# Altium PCB FlightController_Top_5x5.PcbDoc (part 1 of 4)
Units mm, origin at the board's own origin, x right, y up, seen from the top; angles counter-clockwise.
Board outline 127 x 127 mm, 2 copper layers (Top Layer, Bottom Layer), stack 0.691 mm thick; 156 components, 161 nets, 860 pads, 483 vias.
Unrouted connection lines stored in the file: 9.
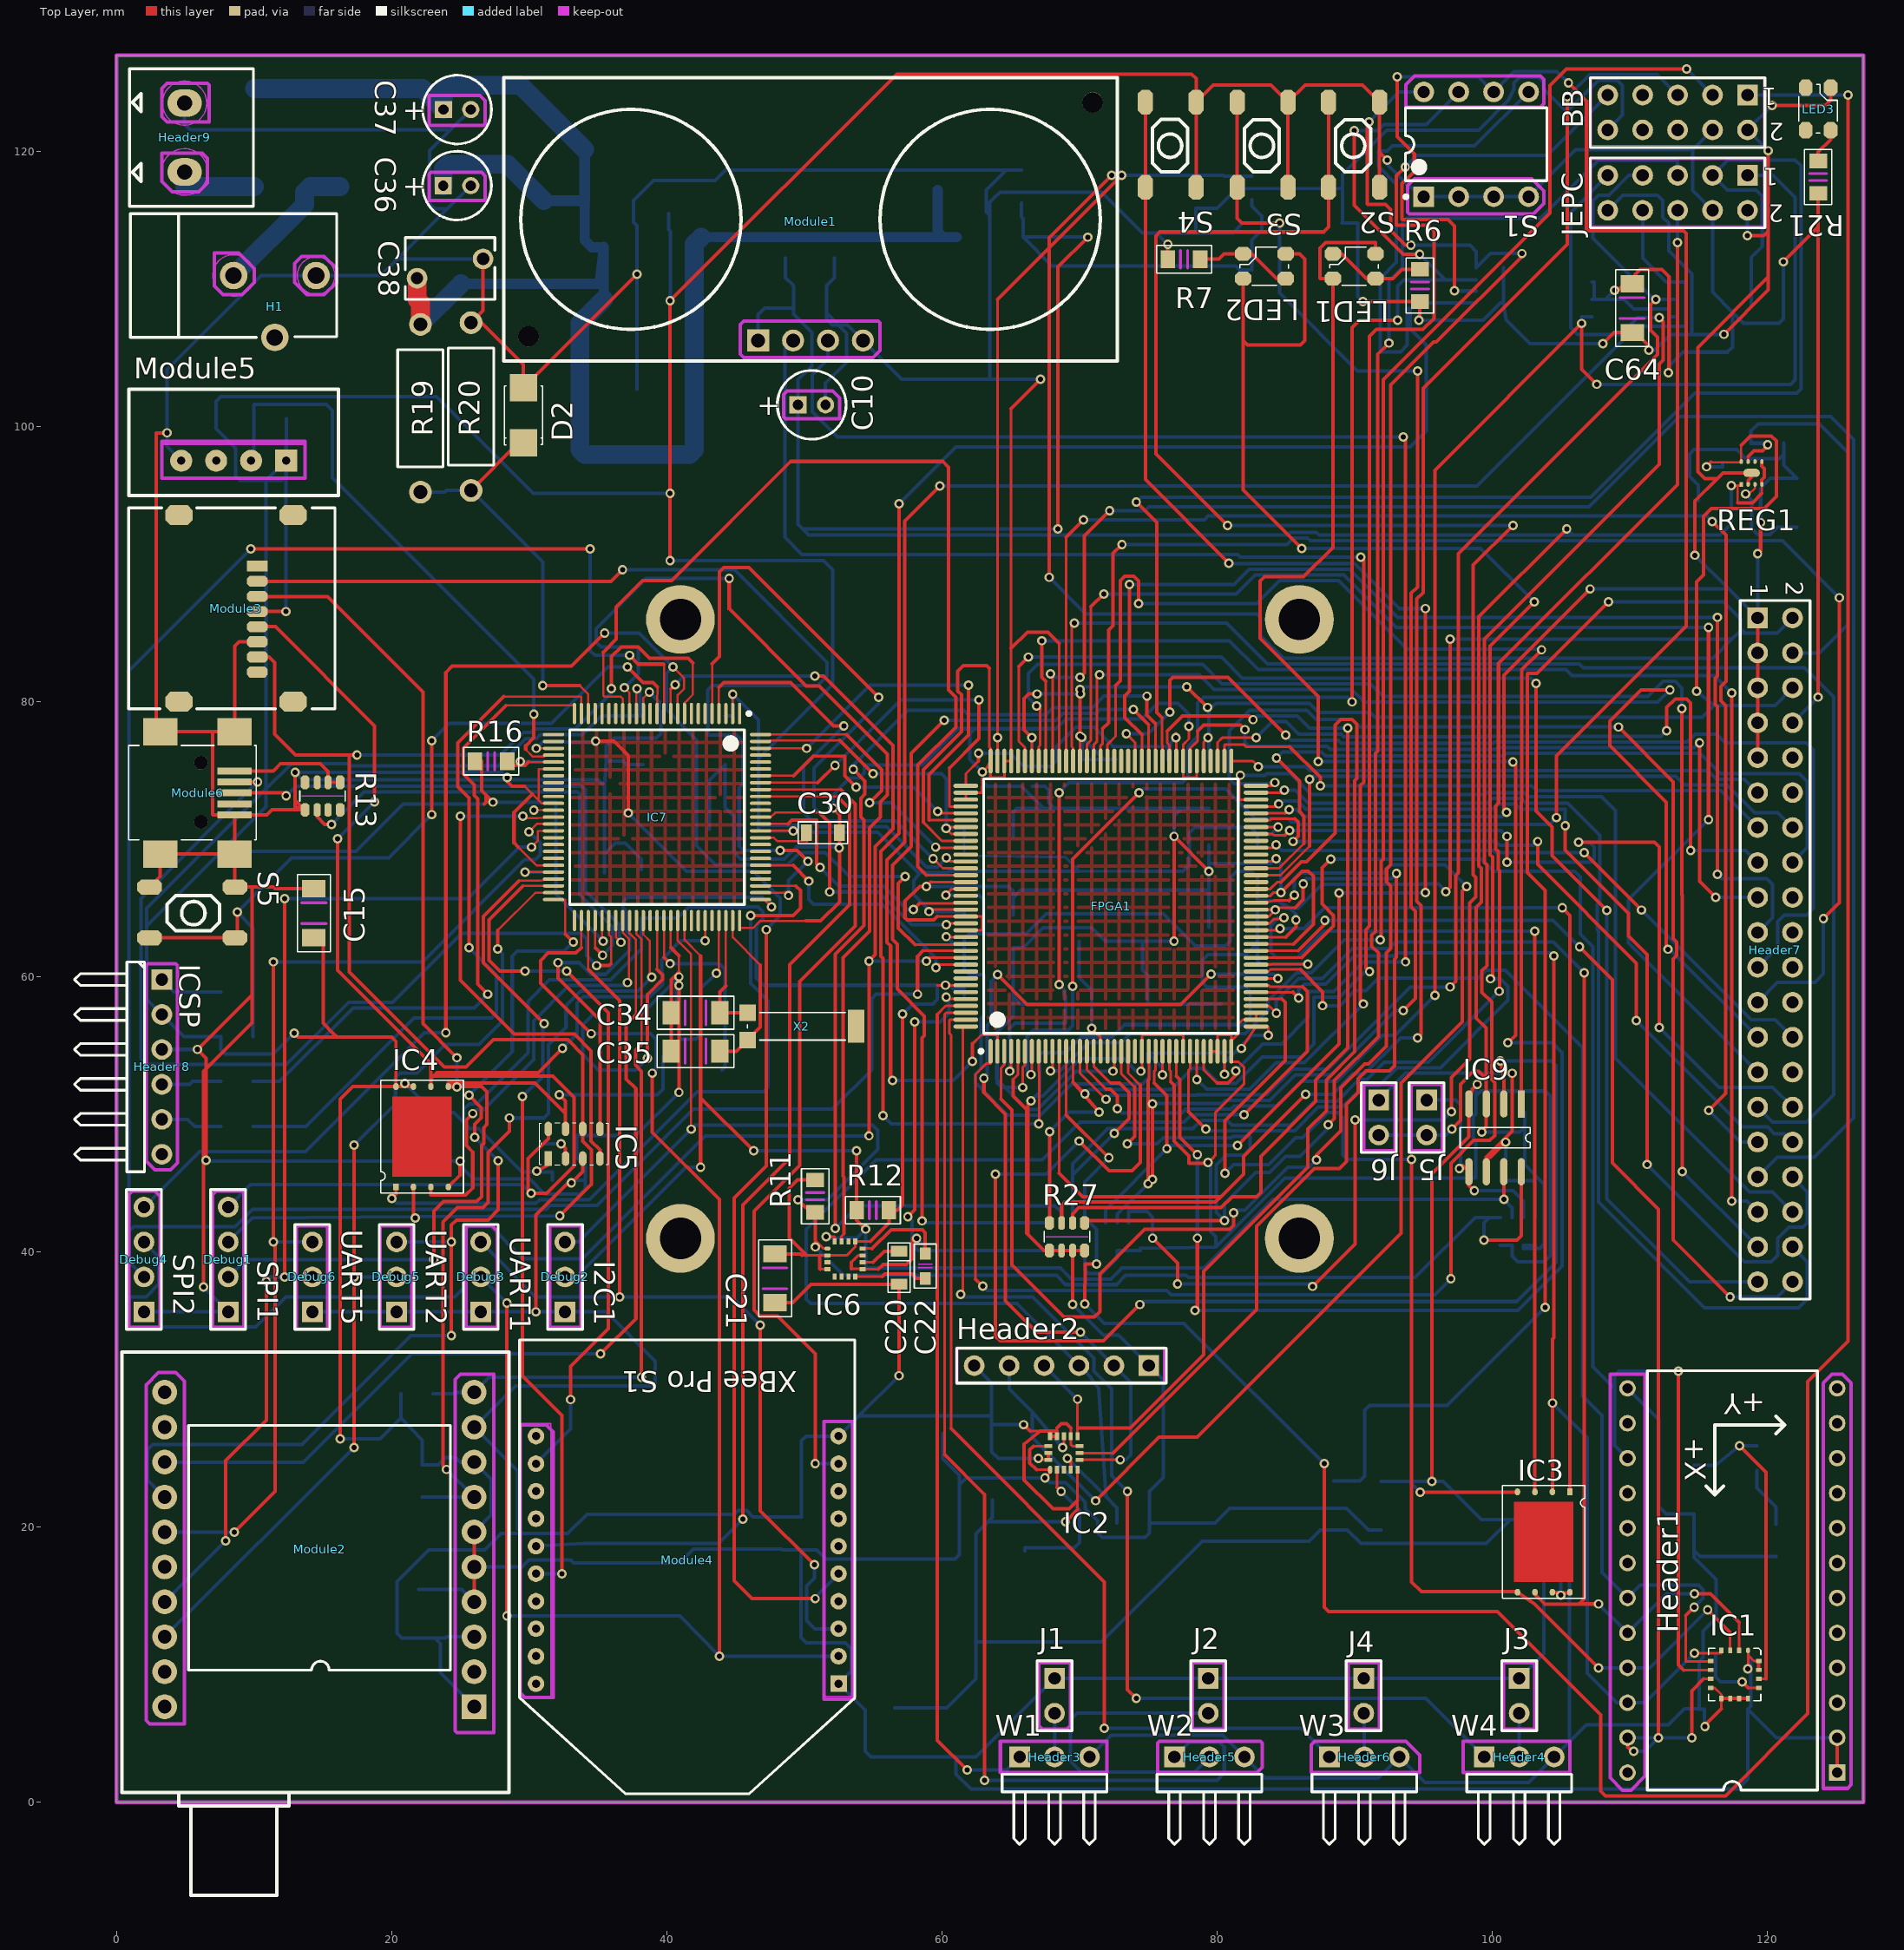
[diagram p0: Top Layer view]
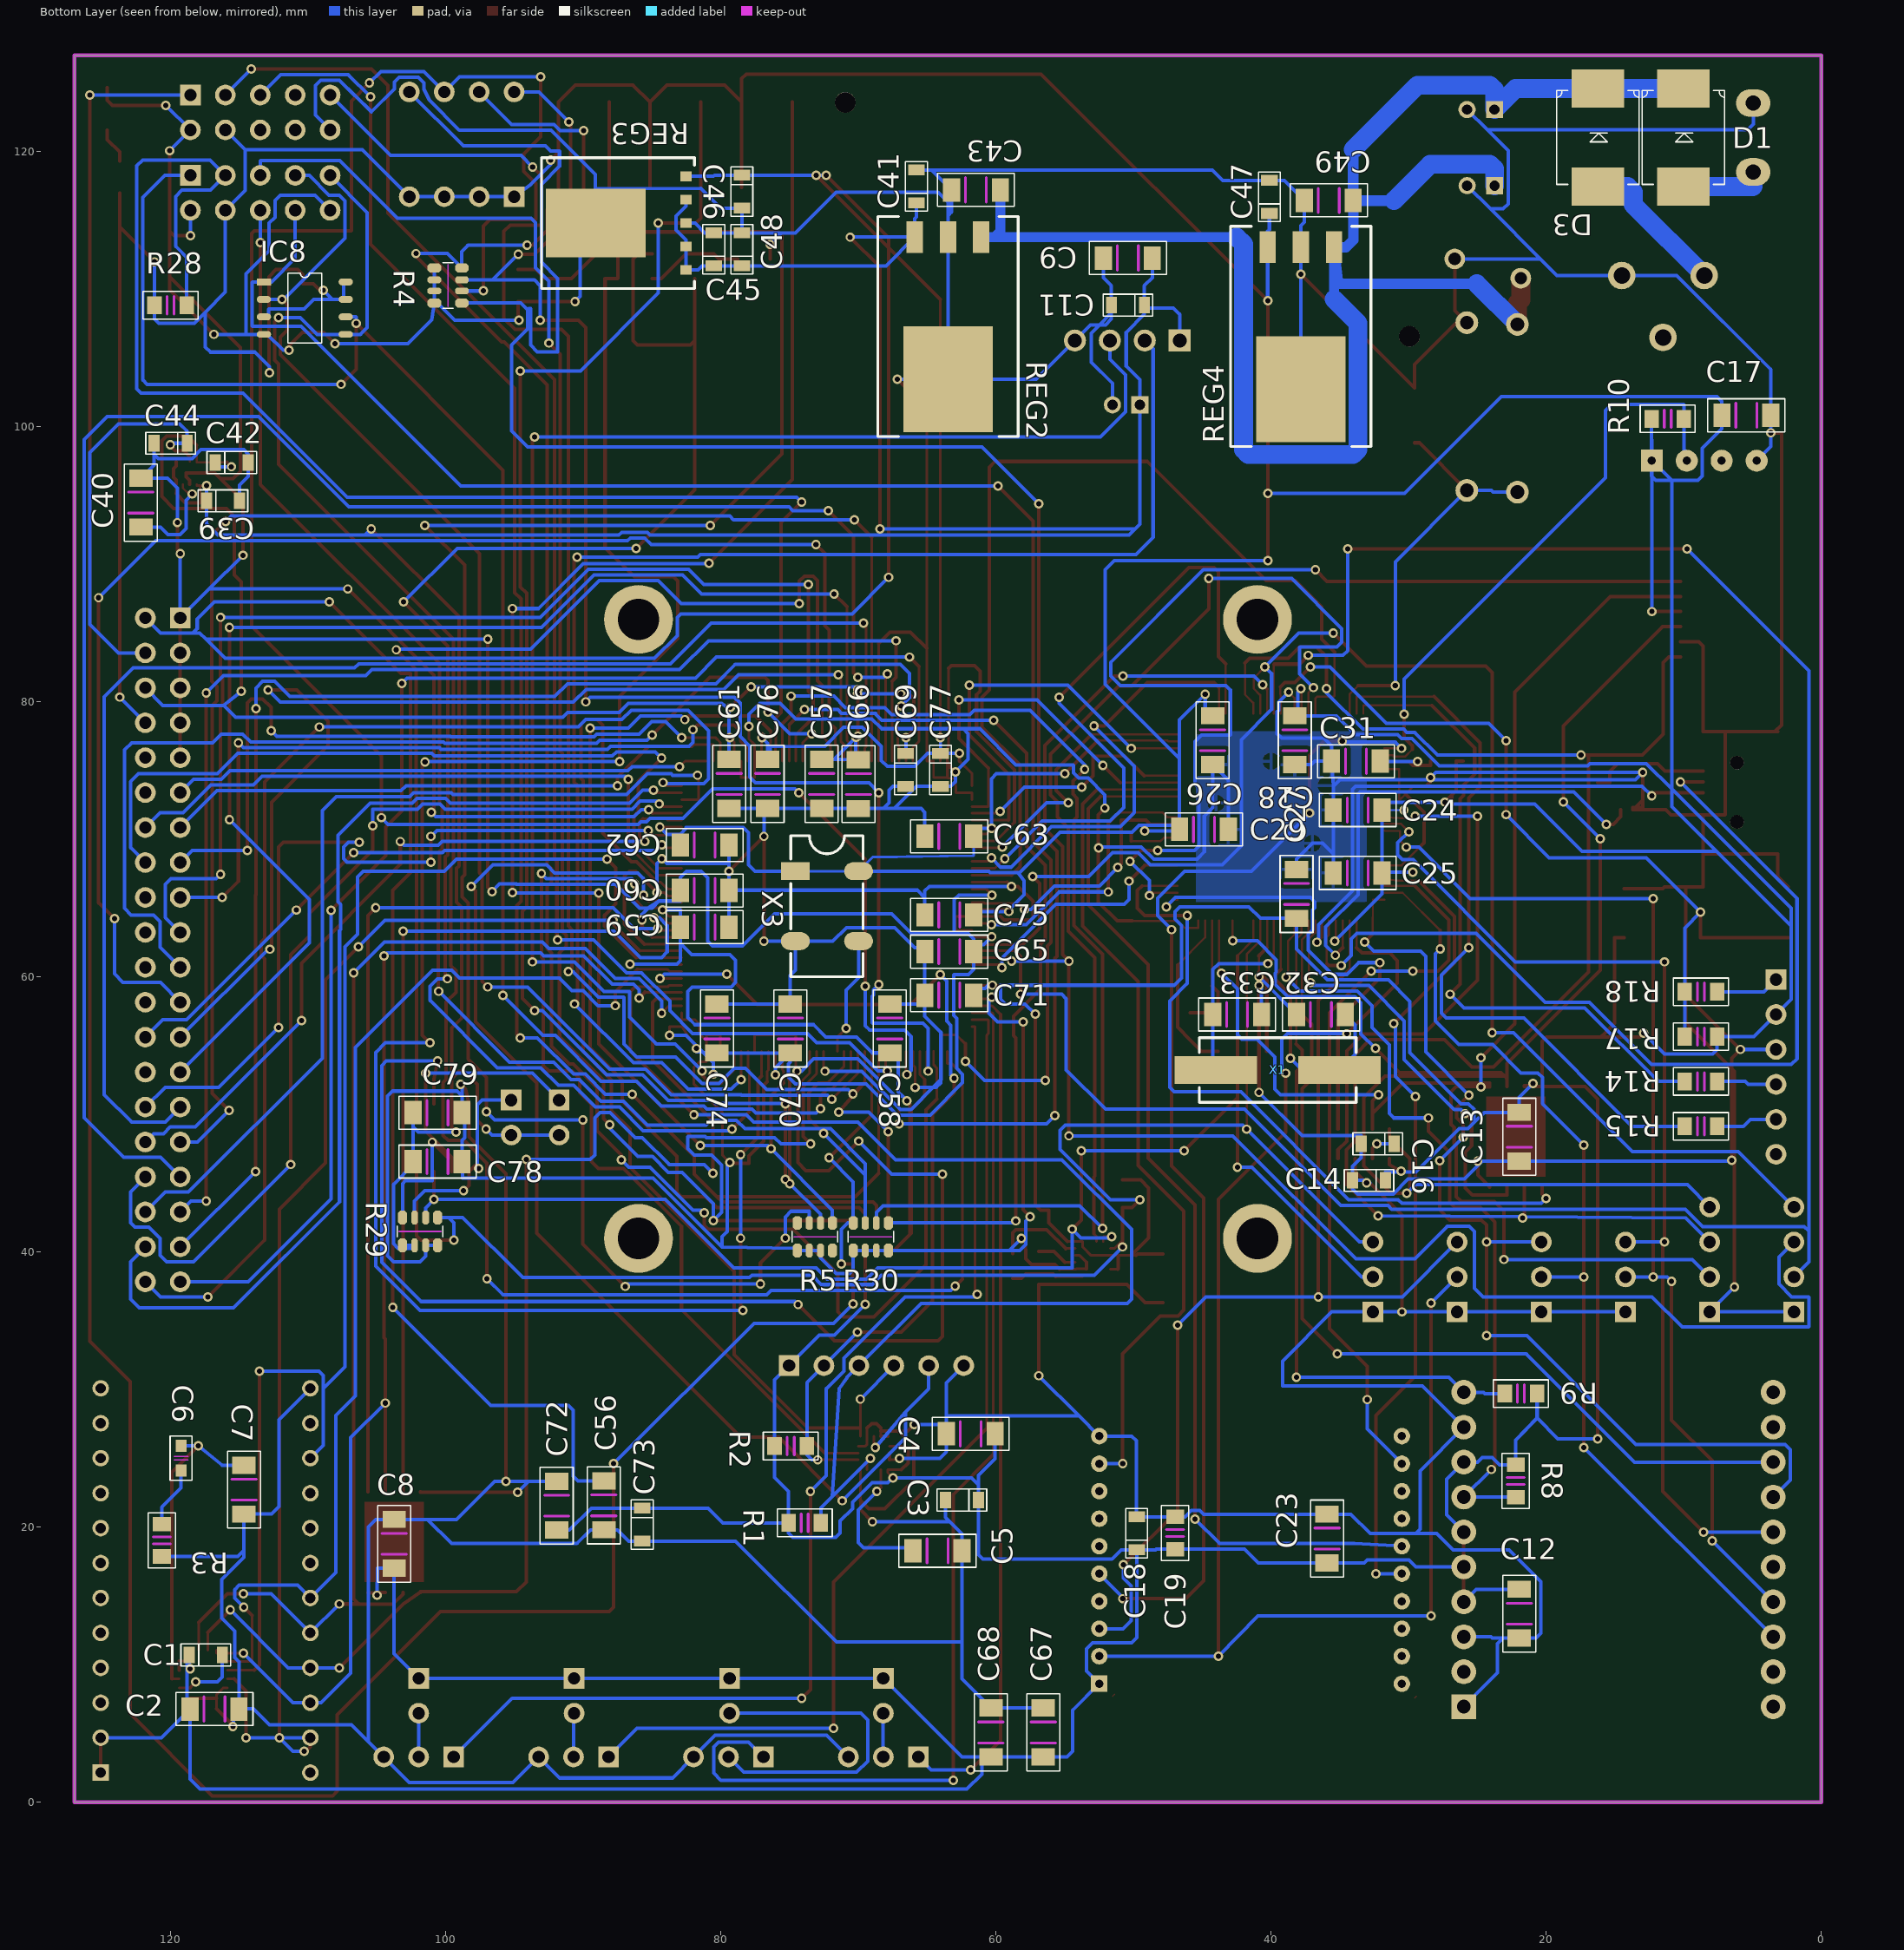
[diagram p1: Bottom Layer view, seen from below]

## Layer stack, top to bottom
Top Layer: signal copper 0.0356
Dielectric: core 0.62, FR-4, Dk 4.8
Bottom Layer: signal copper 0.0356

## Board outline
0,0 127,0 127,127 0,127

## Design rules (kind name [scope] priority, off if disabled: settings)
Clearance Clearance_Pads [IsPad] p1: gap=0.2
Clearance [All] p2: gap=0.154
ComponentClearance [Not All vs Not All] p1: gap=0.153 collisioncheckmode=3 verticalgap=0.254 showdistances=TRUE
DiffPairsRouting [All] p1: maxlimit=0.254 minlimit=0.254 mostfreqgap=0.254 maxuncoupledlength=12.7
Height [All] p1: minheight=0 maxheight=50 prefheight=12.7
HoleSize [All] p1: absolutevalues=TRUE maxlimit=3 minlimit=0.381 maxpercent=80.000 minpercent=20.000
HoleToHoleClearance [All] p1: gap=0.3 allowstackedmicrovias=FALSE
MinimumAnnularRing [All] p1: minimumring=0.089
MinimumSolderMaskSliver [All] p1: minsoldermaskwidth=0.152
PlaneConnect [All] p1: planeconnectstyle=Relief reliefexpansion=0.178 reliefentries=4 reliefconductorwidth=0.381 reliefairgap=0.381
PolygonConnect [All] p1: connectstyle=Relief reliefconductorwidth=0.152 reliefentries=4 polygonreliefangle="45 Angle"
RoutingVias [All] p1: holewidth=0.381 width=0.686 viastyle="Through Hole" minholewidth=0.381 minwidth=0.686 maxholewidth=0.381 maxwidth=0.686
SMDNeckDown [All] p1: percent=63.000
SilkToSilkClearance [All] p1: silktosilkclearance=0.152
SilkscreenOverComponentPads [All] p1: minsilkscreentomaskgap=0.1
SolderMaskExpansion [All] p1: expansion=0
ViasUnderSMD [All] p1: allowed=FALSE
Width Width_Input [(InNet('NetD1_0') OR InNet('NetD3_0') OR InNet('SYS'))] p1: maxlimit=2 minlimit=0.749 preferedwidth=1.37
Width [All] p2: maxlimit=2 minlimit=0.153 preferedwidth=0.254 minimp=50.000000 maximp=50.000000 favimp=50.000000
19 further rules are at their usual default settings.

## Classes and differential pairs
component class Navigator_Core: C24 C25 C26 C27 C28 C29 C30 C31 C32 C33 C34 C35 IC7 R16 R17 R18 S5 X1 X2
component class FPGA_Core: FPGA1 Header7
component class FPGA_Clocks: BB C56 C57 C58 C59 C60 C61 C62 C63 C64 C65 C66 C67 C68 C69 C70 C71 C72 C73 C74 C75 C76 C77 C78 C79 IC8 IC9 J5 J6 JEPC R27 R28 R29 R30 X3
component class FPGA_Components: C1 C2 C3 C4 C5 C6 C7 C8 C9 C10 C11 Header1 Header2 Header3 Header4 Header5 Header6 IC1 IC2 IC3 J1 J2 J3 J4 LED1 LED2 Module1 R1 R2 R3 R4 R5 R6 R7 S1 S2 S3 S4
component class Navigator_Components: C12 C13 C14 C15 C16 C17 C18 C19 C20 C21 C22 IC4 IC5 IC6 Module2 Module3 Module4 Module5 R8 R9 R10 R11 R12
component class Navigator_Connectors: C23 Debug1 Debug2 Debug3 Debug4 Debug5 Debug6 "Header 8" Module6 R13 R14 R15
component class Power: C36 C37 C38 C39 C40 C41 C42 C43 C44 C45 C46 C47 C48 C49 D1 D2 D3 H1 Header9 LED3 R19 R20 R21 REG1 REG2 REG3 REG4
differential pair USB_PIC: +USB_PIC_P -USB_PIC_N

## Components (designator, comment, footprint, x,y, rotation, side; value= is the part's Value field where it differs from the comment)
BB "Header 5X2" HDR2X5 118.575,124.122 r180 top (schematic designator Header13)
C1 "10uF Low-ESR Tantalum CaseA" "CAPACITOR - TANTALUM CASE A" 117.46,10.724 r180 bottom
C2 "0.1uF SMD 1206" "SMD 1206" 116.825,6.787 r0 bottom
C3 "4.7uF Low-ESR Tantalum CaseA" "CAPACITOR - TANTALUM CASE A" 62.484,21.971 r0 bottom
C4 "0.1uF SMD 1206" "SMD 1206" 61.849,26.797 r0 bottom
C5 "0.1uF SMD 1206" "SMD 1206" 64.262,18.288 r0 bottom
C6 "470nF SMD 0603" "SMD 0603" 119.253,25.019 r270 bottom
C7 "0.1uF SMD 1206" "SMD 1206" 114.681,22.733 r270 bottom
C8 "0.1uF SMD 1206" "SMD 1206" 103.759,18.796 r90 bottom
C9 "0.1uF SMD 1206" "SMD 1206" 50.419,112.268 r180 bottom
C10 "10uF Electrolitic" CAPPR2-5x5 50.546,101.6 r0 top
C11 "1.0uF Low-ESR Tantalum CaseA" "CAPACITOR - TANTALUM CASE A" 50.419,108.839 r0 bottom
C12 "0.1uF SMD 1206" "SMD 1206" 21.971,13.716 r270 bottom
C13 "0.1uF SMD 1206" "SMD 1206" 21.971,48.387 r270 bottom
C14 "1.0uF Low-ESR Tantalum CaseA" "CAPACITOR - TANTALUM CASE A" 32.893,45.212 r0 bottom
C15 "0.1uF SMD 1206" "SMD 1206" 14.351,64.643 r270 top
C16 "1.0uF Low-ESR Tantalum CaseA" "CAPACITOR - TANTALUM CASE A" 32.258,47.879 r0 bottom
C17 "0.1uF SMD 1206" "SMD 1206" 5.461,100.838 r180 bottom
C18 "1.0uF Low-ESR Tantalum CaseA" "CAPACITOR - TANTALUM CASE A" 49.784,19.558 r90 bottom
C19 "8.2pF SMD 0805" "SMD 0805" 46.99,19.579 r270 bottom
C20 "4.7uF Low-ESR Tantalum CaseA" "CAPACITOR - TANTALUM CASE A" 56.896,38.862 r270 top
C21 "0.1uF SMD 1206" "SMD 1206" 47.879,38.1 r270 top
C22 "220nF SMD 0603" "SMD 0603" 58.801,38.989 r270 top
C23 "0.1uF SMD 1206" "SMD 1206" 35.941,19.177 r270 bottom
C24 "0.1uF SMD 1206" "SMD 1206" 33.715,72.136 r0 bottom
C25 "0.1uF SMD 1206" "SMD 1206" 33.715,67.564 r0 bottom
C26 "0.1uF SMD 1206" "SMD 1206" 44.256,77.216 r270 bottom
C27 "0.1uF SMD 1206" "SMD 1206" 38.16,66.04 r90 bottom
C28 "0.1uF SMD 1206" "SMD 1206" 38.287,77.216 r270 bottom
C29 "0.1uF SMD 1206" "SMD 1206" 44.891,70.739 r180 bottom
C30 "10uF Low-ESR Tantalum CaseA" "CAPACITOR - TANTALUM CASE A" 51.368,70.485 r0 top
C31 "0.1uF SMD 1206" "SMD 1206" 33.842,75.692 r0 bottom
C32 "22pF SMD 1206" "SMD 1206" 36.382,57.277 r180 bottom
C33 "22pF SMD 1206" "SMD 1206" 42.478,57.277 r0 bottom
C34 "22pF SMD 1206" "SMD 1206" 42.097,57.404 r0 top
C35 "22pF SMD 1206" "SMD 1206" 42.097,54.61 r0 top
C36 "1.0uF Electrolitic" CAPPR2-5x5 24.758,117.533 r0 top
C37 "10uF Electrolitic" CAPPR2-5x5 24.765,123.063 r0 top
C38 "0.1uF Ceramic" CAPRD5-6.5x4.5 24.257,111.506 r180 top
C39 "1.0uF Low-ESR Tantalum CaseA" "CAPACITOR - TANTALUM CASE A" 116.205,94.615 r180 bottom
C40 "0.1uF SMD 1206" "SMD 1206" 122.174,94.488 r270 bottom
C41 "10uF Low-ESR Tantalum CaseA" "CAPACITOR - TANTALUM CASE A" 65.786,117.475 r90 bottom
C42 "1.0uF Low-ESR Tantalum CaseA" "CAPACITOR - TANTALUM CASE A" 115.57,97.409 r180 bottom
C43 "0.1uF SMD 1206" "SMD 1206" 61.468,117.221 r0 bottom
C44 "1.0uF Low-ESR Tantalum CaseA" "CAPACITOR - TANTALUM CASE A" 120.015,98.806 r0 bottom
C45 "1.0uF Low-ESR Tantalum CaseA" "CAPACITOR - TANTALUM CASE A" 80.518,112.903 r90 bottom
C46 "10uF Low-ESR Tantalum CaseA" "CAPACITOR - TANTALUM CASE A" 78.486,117.094 r270 bottom
C47 "10uF Low-ESR Tantalum CaseA" "CAPACITOR - TANTALUM CASE A" 40.132,116.713 r90 bottom
C48 "1.0uF Low-ESR Tantalum CaseA" "CAPACITOR - TANTALUM CASE A" 78.486,112.903 r90 bottom
C49 "0.1uF SMD 1206" "SMD 1206" 35.814,116.459 r180 bottom
C56 "0.1uF SMD 1206" "SMD 1206" 88.519,21.59 r270 bottom
C57 "0.1uF SMD 1206" "SMD 1206" 72.679,74.041 r270 bottom
C58 "0.1uF SMD 1206" "SMD 1206" 67.726,56.261 r90 bottom
C59 "0.1uF SMD 1206" "SMD 1206" 81.188,63.627 r180 bottom
C60 "0.1uF SMD 1206" "SMD 1206" 81.188,66.294 r180 bottom
C61 "0.1uF SMD 1206" "SMD 1206" 79.41,74.041 r270 bottom
C62 "0.1uF SMD 1206" "SMD 1206" 81.188,69.596 r180 bottom
C63 "0.1uF SMD 1206" "SMD 1206" 63.408,70.231 r0 bottom
C64 "0.1uF SMD 1206" "SMD 1206" 110.193,108.628 r270 top
C65 "0.1uF SMD 1206" "SMD 1206" 63.408,61.849 r0 bottom
C66 "0.1uF SMD 1206" "SMD 1206" 70.012,74.024 r270 bottom
C67 "0.1uF SMD 1206" "SMD 1206" 56.569,5.085 r90 bottom
C68 "0.1uF SMD 1206" "SMD 1206" 60.38,5.085 r90 bottom
C69 "1.0uF Low-ESR Tantalum CaseA" "CAPACITOR - TANTALUM CASE A" 66.583,75.057 r270 bottom
C70 "0.1uF SMD 1206" "SMD 1206" 74.965,56.261 r90 bottom
C71 "0.1uF SMD 1206" "SMD 1206" 63.408,58.674 r0 bottom
C72 "0.1uF SMD 1206" "SMD 1206" 91.948,21.567 r90 bottom
C73 "1.0uF Low-ESR Tantalum CaseA" "CAPACITOR - TANTALUM CASE A" 85.725,20.193 r270 bottom
C74 "0.1uF SMD 1206" "SMD 1206" 80.299,56.261 r90 bottom
C75 "0.1uF SMD 1206" "SMD 1206" 63.408,64.516 r0 bottom
C76 "0.1uF SMD 1206" "SMD 1206" 76.616,74.041 r270 bottom
C77 "1.0uF Low-ESR Tantalum CaseA" "CAPACITOR - TANTALUM CASE A" 64.043,75.057 r270 bottom
C78 "0.1uF SMD 1206" "SMD 1206" 100.607,46.584 r0 bottom
C79 "10nF SMD 1206" "SMD 1206" 100.607,50.14 r0 bottom
D1 "MBRS540T3G" MBRS540T3G 10.033,121.031 r270 bottom
D2 "1SMAS913BT3G" 1SMA5913BT3G 29.591,100.838 r90 top
D3 "MBRS540T3G" MBRS540T3G 16.256,121.031 r270 bottom
Debug1 "SPI1" HDR1X4 8.123,35.657 r90 top
Debug2 "I2C1" HDR1X3 32.609,35.657 r90 top
Debug3 "UART1" HDR1X3 26.488,35.657 r90 top
Debug4 "SPI2" HDR1X4 2.002,35.657 r90 top
Debug5 "UART2" HDR1X3 20.366,35.657 r90 top
Debug6 "UART5" HDR1X3 14.245,35.657 r90 top
FPGA1 "EP2C8T144C8N" TQFP144_N 72.298,65.151 r90 top
H1 "DC Jack" "DC POWER JACK" 1.016,110.998 r180 top
Header1 "L3G4200D Header" DIP24 125.095,2.159 r180 top
Header2 "Header 6" HDR1X6 75.057,31.75 r180 top
Header3 "W1" HDR1X3H 65.659,3.302 r0 top
Header4 "W4" HDR1X3H 99.441,3.302 r0 top
Header5 "W2" HDR1X3H 76.92,3.302 r0 top
Header6 "W3" HDR1X3H 88.18,3.302 r0 top
Header7 "Header 20X2H" HDR2X20 119.311,86.106 r270 top
Header9 "Battery Conn" "PC WIRE CONNECTOR" 4.953,121.031 r90 top
"Header 8" "ICSP" HDR1X6H 3.302,59.817 r270 top (schematic designator Header8)
IC1 "L3G4200D" L3G4200DTR 118.618,11.049 r270 top
IC2 "MMA8452Q" MMA8452QT 68.875,25.4 r90 top
IC3 "S25FL128P" S25FL128P 103.759,18.923 r270 top
IC4 "S25FL128P" S25FL128P 22.225,48.387 r90 top
IC5 "MPL115A1" MPL115A1 33.274,47.879 r90 top
IC6 "HMC5883L" HMC5883L-TR 51.689,40.259 r0 top
IC7 "PIC32MX795F512L-80I/PT" TQFP-PF100_L 39.303,71.628 r270 top
IC8 "EPCS16SI8N" "EPCS16SI8N SO-8" 112.733,110.533 r180 bottom
IC9 "DS1085" "DS1085 SO-150MIL" 102.131,50.775 r270 top
J1 "Jumper" HDR1X2 68.199,9.017 r270 top
J2 "Jumper" HDR1X2 79.375,9.017 r270 top
J3 "Jumper" HDR1X2 101.981,9.017 r270 top
J4 "Jumper" HDR1X2 90.678,9.017 r270 top
J5 "Jumper" HDR1X2 95.25,51.054 r270 top
J6 "Jumper" HDR1X2 91.767,51.054 r270 top
JEPC "Header 5X2" HDR2X5 118.575,118.28 r180 top (schematic designator Header12)
LED1 "LED PLCC-4" "PLCC-4 LED" 89.978,111.676 r0 top
LED2 "LED PLCC-4" "PLCC-4 LED" 83.461,111.676 r0 top
LED3 "LED PLCC-4" "PLCC-4 LED" 123.713,123.106 r270 top
Module1 "HC-SR04 Ultrasonic Module" "HC-SR04 ULTRASONIC RANGER" 72.771,104.775 r180 top
Module2 "Copernicus II DIP Module" "COPERNICUS GPS MODULE" 28.545,0.732 r180 top
Module3 "MicroSD Socket" "MICROSD CARD SLOT" 0.889,80.01 r90 top
Module4 "XBee Pro S1" "XBEE PRO S1 WIRELESS MODULE" 41.499,17.623 r180 top
Module5 "RHT03" "RHT03 HUMIDITY SENSOR" 16.129,94.996 r180 top
Module6 "Mini-USB" "MINI B USB CONNECTOR" 0.889,76.835 r270 top
R1 "4.7K SMD 0805" "SMD 0805" 73.914,20.32 r0 bottom
R2 "4.7K SMD 0805" "SMD 0805" 74.93,25.908 r180 bottom
R3 "10K SMD 0805" "SMD 0805" 120.65,19.05 r270 bottom
R4 "Value: 10K SMD Resistor Array" "RESISTOR ARRAY YC164" 99.837,110.279 r0 bottom
R5 "Value: 10K SMD Resistor Array" "RESISTOR ARRAY YC164" 73.175,41.123 r270 bottom
R6 "1K SMD 0805" "SMD 0805" 94.757,110.279 r270 top
R7 "1K SMD 0805" "SMD 0805" 77.612,112.184 r180 top
R8 "10K SMD 0805" "SMD 0805" 22.225,23.368 r270 bottom
R9 "10K SMD 0805" "SMD 0805" 21.844,29.718 r0 bottom
R10 "1K SMD 0805" "SMD 0805" 11.176,100.584 r0 bottom
R11 "2.2K SMD 0805" "SMD 0805" 50.8,44.069 r90 top
R12 "2.2K SMD 0805" "SMD 0805" 54.991,43.053 r0 top
R13 "Value: 10K SMD Resistor Array" "RESISTOR ARRAY YC164" 14.986,73.152 r270 top
R14 "100 SMD 0805" "SMD 0805" 8.763,52.409 r0 bottom
R15 "100 SMD 0805" "SMD 0805" 8.763,49.149 r0 bottom
R16 "10 SMD 0805" "SMD 0805" 27.238,75.692 r180 top
R17 "10K SMD 0805" "SMD 0805" 8.763,55.668 r180 bottom
R18 "100 SMD 0805" "SMD 0805" 8.763,58.928 r180 bottom
R19 "3.9K Radial" RES12.2-8.5X3.3 22.098,101.346 r90 top
R20 "1.3K Radial" RES12.2-8.5X3.3 25.781,101.473 r270 top
R21 "1K SMD 0805" "SMD 0805" 123.713,118.153 r270 top
R27 "Value: 10K SMD Resistor Array" "RESISTOR ARRAY YC164" 69.111,41.123 r270 top
R28 "10K SMD 0805" "SMD 0805" 120.015,108.839 r180 bottom
R29 "Value: 10K SMD Resistor Array" "RESISTOR ARRAY YC164" 101.877,41.504 r90 bottom
R30 "Value: 10K SMD Resistor Array" "RESISTOR ARRAY YC164" 69.111,41.123 r270 bottom
REG1 "MIC5330-MFYML" "MIC5330-MFYML TR" 118.872,96.647 r90 top
REG2 "MIC29300-5.0WU" "TO-263 D2PACK" 63.5,113.792 r270 bottom
REG3 "MIC49300-1.2WR" "MIC49300-1.2WR SPACK-5" 82.55,114.808 r0 bottom
REG4 "MIC29300-3.3WU" "TO-263 D2PACK" 37.846,113.076 r270 bottom
S1 "SW-DIP4" DIP-8 98.851,120.536 r90 top
S2 "SMD Tactile Switch" "SMD TACTILE SWITCH" 91.819,123.603 r270 top
S3 "SMD Tactile Switch" "SMD TACTILE SWITCH" 85.175,123.603 r270 top
S4 "SMD Tactile Switch" "SMD TACTILE SWITCH" 78.501,123.614 r270 top
S5 "SMD Tactile Switch" "SMD TACTILE SWITCH" 2.413,66.548 r0 top
X1 "XT9M20ANA8M" "XT9M20ANA8M - 8MHZ CAPACITOR" 39.527,53.243 r180 bottom
X2 "SSP-T6-7PF-20PPM" "32.768KHZ CRYSTAL" 45.877,56.418 r270 top
X3 "SE2838CT-ND" "SG-636PCE 25.175MHZ CRYSTAL" 72.298,65.151 r180 bottom

## Footprints (in the part's own frame and the unit in brackets; to place one, negate y for a bottom-side part, rotate by r counter-clockwise, add the part's x,y. Pads: shape width x height; smd on the part's side, far side on the other; paste and mask are expansions set on the pad)
1SMA5913BT3G [mm]
  rect 2x2 smd: A(2,0) K(-2,0)
  silkscreen extent -2.16,-1.4 2.13,1.4
"32.768KHZ CRYSTAL" [mm]
  rect 1.2x1.2 smd: 1(-1,0) 2(1,0)
  rect 2.4x1.2 smd: NC(0,7.9)
  silkscreen extent -1,0 1,7.11
"CAPACITOR - TANTALUM CASE A" [mm]
  rect 0.8x1.2 smd: 1(-1.2,0) 2(1.2,0)
  silkscreen extent -1.8,-0.8 1.8,0.8
CAPPR2-5x5 [mm] "Capacitor, Electrolytic, Radial; Body 5 x 5 mm (Dia.xH typ); Pin Spacing 2 mm (typ)"
  rect 1.25x1.25 hole 0.75: 1(-1,0)
  round 1.25 hole 0.75: 2(1,0)
  silkscreen extent -2.5,-2.5 2.5,2.5
CAPRD5-6.5x4.5 [mm] "Capacitor, Ceramic, Thru-Hole, Disc; Body 6.5 x 4.5 mm (LxW max) Pin Spacing 5 mm (typ)"
  round 1.5 hole 0.9: 1(-2.4,-0.7) 2(2.4,0.7)
  silkscreen extent -3.25,-2.25 3.25,2.25
"COPERNICUS GPS MODULE" [mm]
  rect 1.8x1.8 hole 1: 1(2.54,-6.223)
  round 1.8 hole 1: 2(2.54,-8.763) 3(2.54,-11.303) 4(2.54,-13.843) 5(2.54,-16.383) 6(2.54,-18.923) 7(2.54,-21.463) 8(2.54,-24.003) 9(2.54,-26.543) 10(2.54,-29.083) 11(25.04,-29.083) 12(25.04,-26.543) 13(25.04,-24.003) 14(25.04,-21.463) 15(25.04,-18.923) 16(25.04,-16.383) 17(25.04,-13.843) 18(25.04,-11.303) 19(25.04,-8.763) 20(25.04,-6.223)
  silkscreen extent 0,-32 28.15,7.5
"DC POWER JACK" [mm]
  round 2 hole 1.2: IN(-7.5,0) NC(-10.5,4.5) OUT(-13.5,0)
  Top Layer keep-out circle w0.1: c-13.5,0 r1.359
  Top Layer keep-out circle w0.1: c-7.5,0 r1.517
  silkscreen extent -15,-4.5 0,4.5
DIP24 [mm]
  rect 1.2x1.2 hole 0.75: 1(0,0)
  round 1.2 hole 0.75: 2(0,-2.54) 3(0,-5.08) 4(0,-7.62) 5(0,-10.16) 6(0,-12.7) 7(0,-15.24) 8(0,-17.78) 9(0,-20.32) 10(0,-22.86) 11(0,-25.4) 12(0,-27.94) 13(15.24,-27.94) 14(15.24,-25.4) 15(15.24,-22.86) 16(15.24,-20.32) 17(15.24,-17.78) 18(15.24,-15.24) 19(15.24,-12.7) 20(15.24,-10.16) 21(15.24,-7.62) 22(15.24,-5.08) 23(15.24,-2.54) 24(15.24,0)
  silkscreen extent 1.43,-29.21 13.8,1.27
DIP-8 [mm] "DIP; 8 Leads; Row Spacing 7.62 mm; Pitch 2.54 mm"
  rect 1.5x1.5 hole 0.9: 1(-3.81,3.81)
  round 1.5 hole 0.9: 2(-3.81,1.27) 3(-3.81,-1.27) 4(-3.81,-3.81) 5(3.81,-3.81) 6(3.81,-1.27) 7(3.81,1.27) 8(3.81,3.81)
  silkscreen extent -3.93,-5.15 2.65,5.23, body extent -3.6,-5.15 3.6,5.15, height 5.08
"DS1085 SO-150MIL" [mm]
  rect 1.98x0.53 smd: 1(0,0)
  oval 1.98x0.53 smd: 2(0,-1.27) 3(0,-2.54) 4(0,-3.81) 5(4.93,-3.81) 6(4.93,-2.54) 7(4.93,-1.27) 8(4.93,0)
  silkscreen extent 1.72,-4.45 3.2,0.64
"EPCS16SI8N SO-8" [mm]
  rect 1.04x0.5 smd: 1(-0.5,0)
  oval 1.04x0.5 smd: 2(-0.5,-1.27) 3(-0.5,-2.54) 4(-0.5,-3.81) 5(5.45,-3.81) 6(5.45,-2.54) 7(5.45,-1.27) 8(5.45,0)
  silkscreen extent 1.25,-4.44 3.7,0.64
"HC-SR04 ULTRASONIC RANGER" [mm]
  rect 1.6x1.6 hole 1: 1(26.12,-1.5)
  round 1.6 hole 1: 2(23.58,-1.5) 3(21.04,-1.5) 4(18.5,-1.5)
  round 1.5 hole 1.5: NC(1.8,-18.8) NC(42.82,-1.8)
  silkscreen extent 0,-20.6 44.62,0
HDR1X2 [mm] "Connector; Header; 2 Position"
  rect 1.5x1.5 hole 0.9: 1(0,0)
  round 1.5 hole 0.9: 2(2.54,0)
  silkscreen extent -1.27,-1.27 3.81,1.27
HDR1X3 [mm] "Connector; Header; 3 Position"
  rect 1.5x1.5 hole 0.9: 1(0,0)
  round 1.5 hole 0.9: 2(2.54,0) 3(5.08,0)
  silkscreen extent -1.27,-1.27 6.35,1.27
HDR1X3H [mm] "Connector; Header; 3 Position; Right Angle"
  rect 1.5x1.5 hole 0.9: 1(0,0)
  round 1.5 hole 0.9: 2(2.54,0) 3(5.08,0)
  silkscreen extent -1.27,-6.35 6.35,-1.27
HDR1X4 [mm] "Connector; Header; 4 Position"
  rect 1.5x1.5 hole 0.9: 1(0,0)
  round 1.5 hole 0.9: 2(2.54,0) 3(5.08,0) 4(7.62,0)
  silkscreen extent -1.27,-1.27 8.89,1.27
HDR1X6 [mm] "Connector; Header; 6 Position"
  rect 1.5x1.5 hole 0.9: 1(0,0)
  round 1.5 hole 0.9: 2(2.54,0) 3(5.08,0) 4(7.62,0) 5(10.16,0) 6(12.7,0)
  silkscreen extent -1.27,-1.27 13.97,1.27
HDR1X6H [mm] "Connector; Header; 6 Position; Right Angle"
  rect 1.5x1.5 hole 0.9: 1(0,0)
  round 1.5 hole 0.9: 2(2.54,0) 3(5.08,0) 4(7.62,0) 5(10.16,0) 6(12.7,0)
  silkscreen extent -1.27,-6.35 13.97,-1.27
HDR2X5 [mm] "Connector; Header; 5x2 Position"
  rect 1.5x1.5 hole 0.9: 1(0,0)
  round 1.5 hole 0.9: 2(0,2.54) 3(2.54,0) 4(2.54,2.54) 5(5.08,0) 6(5.08,2.54) 7(7.62,0) 8(7.62,2.54) 9(10.16,0) 10(10.16,2.54)
  silkscreen extent -1.27,-1.27 11.43,3.81
HDR2X20 [mm] "Connector; Header; 20x2 Position"
  rect 1.5x1.5 hole 0.9: 1(0,0)
  round 1.5 hole 0.9: 2(0,2.54) 3(2.54,0) 4(2.54,2.54) 5(5.08,0) 6(5.08,2.54) 7(7.62,0) 8(7.62,2.54) 9(10.16,0) 10(10.16,2.54) 11(12.7,0) 12(12.7,2.54) 13(15.24,0) 14(15.24,2.54) 15(17.78,0) 16(17.78,2.54) 17(20.32,0) 18(20.32,2.54) 19(22.86,0) 20(22.86,2.54) 21(25.4,0) 22(25.4,2.54) 23(27.94,0) 24(27.94,2.54) 25(30.48,0) 26(30.48,2.54) 27(33.02,0) 28(33.02,2.54) 29(35.56,0) 30(35.56,2.54) 31(38.1,0) 32(38.1,2.54) 33(40.64,0) 34(40.64,2.54) 35(43.18,0) 36(43.18,2.54) 37(45.72,0) 38(45.72,2.54) 39(48.26,0) 40(48.26,2.54)
  silkscreen extent -1.27,-1.27 49.53,3.81
HMC5883L-TR [mm]
  oval 0.45x0.3 smd: 1(0,0)
  rect 0.45x0.3 smd: 2(0,-0.5) 3(0,-1) 4(0,-1.5) 9(2.55,-1.5) 10(2.55,-1) 11(2.55,-0.5) 12(2.55,0)
  rect 0.3x0.45 smd: 5(0.525,-2.025) 6(1.025,-2.025) 7(1.525,-2.025) 8(2.025,-2.025) 13(2.025,0.525) 14(1.525,0.525) 15(1.025,0.525) 16(0.525,0.525)
L3G4200DTR [mm]
  oval 0.4x0.3 smd: 1(0,0)
  rect 0.4x0.3 smd: 2(0,-0.65) 3(0,-1.3) 4(0,-1.95) 9(3.5,-1.95) 10(3.5,-1.3) 11(3.5,-0.65) 12(3.5,0)
  rect 0.3x0.4 smd: 5(0.775,-2.725) 6(1.425,-2.725) 7(2.075,-2.725) 8(2.725,-2.725) 13(2.725,0.775) 14(2.075,0.775) 15(1.425,0.775) 16(0.775,0.775)
  silkscreen extent -0.15,-2.88 3.65,0.92
MBRS540T3G [mil]
  rect 110x150 smd: A(140.49,0) K(-140.47,0)
  silkscreen extent -134,-118 134,118
"MIC5330-MFYML TR" [mm]
  rect 0.35x0.25 smd: 1(-0.825,0.75)
  oval 0.35x0.25 smd: 2(-0.825,0.25) 3(-0.825,-0.25) 4(-0.825,-0.75) 5(0.825,-0.75) 6(0.825,-0.25) 7(0.825,0.25) 8(0.825,0.75)
  oval 0.6x1.2 smd: 2(0,0)
"MIC49300-1.2WR SPACK-5" [mm]
  rect 0.8x0.7 smd: 1(0,3.4) 2(0,1.7) 3(0,0) 4(0,-1.7) 5(0,-3.4)
  rect 7.25x5 smd: 3(6.555,0)
  silkscreen extent -0.62,-4.75 10.5,4.75
"MICROSD CARD SLOT" [mm]
  rect 0.8x1.5 smd: 1(9.859,-9.35)
  oct 0.8x1.5 smd: 2(8.759,-9.35) 3(7.659,-9.35) 4(6.559,-9.35) 5(5.459,-9.35) 6(4.359,-9.35) 7(3.259,-9.35) 8(2.159,-9.35)
  oct 1.45x2 smd: SHLD(0,-3.65) SHLD(0,-11.95) SHLD(13.56,-11.95) SHLD(13.56,-3.65)
  silkscreen extent -0.51,-15 14.1,0
"MINI B USB CONNECTOR" [mm]
  rect 2x2.5 smd: 1(-1,7.7) 1(-1,2.3) 1(7.9,7.7) 1(7.9,2.3)
  rect 0.5x2.5 smd: 1(5.05,7.7) 2(4.25,7.7) 3(3.45,7.7) 4(2.65,7.7) 5(1.85,7.7)
  round 1 hole 1: NC(1.25,5.25) NC(5.56,5.25)
  silkscreen extent 0,0 6.86,9.27
MMA8452QT [mm]
  oval 0.567x0.3 smd: 1(-1.216,1)
  rect 0.567x0.3 smd: 2(-1.216,0.5) 3(-1.216,0) 4(-1.216,-0.5) 5(-1.216,-1) 9(1.216,-1) 10(1.216,-0.5) 11(1.216,0) 12(1.216,0.5) 13(1.216,1)
  rect 0.3x0.567 smd: 6(-0.5,-1.134) 7(0,-1.134) 8(0.5,-1.134) 14(0.5,1.134) 15(0,1.134) 16(-0.5,1.134)
MPL115A1 [mm]
  rect 1.05x0.55 smd: 1(-1.075,1.875)
  oval 1.05x0.55 smd: 2(-1.075,0.625) 3(-1.075,-0.625) 4(-1.075,-1.875) 5(1.075,-1.875) 6(1.075,-0.625) 7(1.075,0.625) 8(1.075,1.875)
  silkscreen extent -1.52,-2.5 1.52,2.5
"PC WIRE CONNECTOR" [mm]
  oval 2x2.5 hole 1.1: L(-2.5,0) R(2.5,0)
  Top Layer keep-out circle w0.1: c2.5,0 r1.611
  Top Layer keep-out circle w0.1: c-2.5,0 r1.691
  silkscreen extent -5,-5 5,4
"PLCC-4 LED" [mm]
  oct 1.2x1 smd: 1(-1.55,0.9) 2(1.55,0.9) 3(-1.55,-0.9) 4(1.55,-0.9)
  silkscreen extent -1.78,-1.4 1.75,1.4
RES12.2-8.5X3.3 [mm] "Resistor, Axial; Body 8.5 x 3.3 mm (LxDia. max), Lead Dia. 0.7 mm (max)"
  round 1.65 hole 1: 1(-6.1,0) 2(6.1,0)
  silkscreen extent -4.25,-1.65 4.25,1.65
"RESISTOR ARRAY YC164" [mm]
  oct 1x0.65 smd: 1(-1,1.275) 4(-1,-1.275) 5(1,-1.275) 8(1,1.275)
  oct 1x0.5 smd: 2(-1,0.4) 3(-1,-0.4) 6(1,-0.4) 7(1,0.4)
  Top Layer keep-out lines w0.1: 0,1.524 0,-1.524
  Mechanical 1 keep-out lines w0.1: -1.905,1.905 1.905,1.905 1.905,-1.905 -1.905,-1.905 -1.905,1.905
  silkscreen extent -0.38,-1.65 0.38,1.65
"RHT03 HUMIDITY SENSOR" [mm]
  rect 1.6x1.6 hole 0.6: 1(3.8,-2.54)
  round 1.6 hole 0.6: 2(6.34,-2.54) 3(8.88,-2.54) 4(11.42,-2.54)
  Top Layer keep-out lines w0.254: 12.827,-1.27 2.413,-1.27 2.413,-3.81 12.827,-3.81 12.827,-1.27
  silkscreen extent 0,-7.75 15.22,0
S25FL128P [mm]
  rect 0.5x0.4 smd: 1(-3.65,1.905)
  oval 0.5x0.4 smd: 2(-3.65,0.635) 3(-3.65,-0.635) 4(-3.65,-1.905) 5(3.65,-1.905) 6(3.65,-0.635) 7(3.65,0.635) 8(3.65,1.905)
  Top Layer region: -2.921,-2.159 2.921,-2.159 2.921,2.159 -2.921,2.159
  silkscreen extent -4.1,-3 4.1,3
"SG-636PCE 25.175MHZ CRYSTAL" [mm]
  rect 2.1x1.3 smd: 1(-2.3,2.54)
  oval 2.1x1.3 smd: 2(-2.3,-2.54) 3(2.3,-2.54) 4(2.3,2.54)
  silkscreen extent -2.63,-5.13 2.63,5.12
"SMD 0603" [mm]
  rect 0.9x0.8 smd: 1(-0.9,0) 2(0.9,0)
  Top Layer keep-out lines w0.1: 0.127,0.508 0.127,-0.508 ; -0.127,0.508 -0.127,-0.508
  silkscreen extent -1.6,-0.8 1.6,0.8
"SMD 0805" [mm]
  rect 1.05x1.3 smd: 1(-1.175,0) 2(1.175,0)
  Top Layer keep-out lines w0.2: 0.254,0.635 0.254,-0.635 ; -0.254,0.635 -0.254,-0.635
  silkscreen extent -2,-1 2,1
"SMD 1206" [mm]
  rect 1.25x1.7 smd: 1(-1.775,0) 2(1.775,0)
  Top Layer keep-out lines w0.2: -0.762,0.889 -0.762,-0.889 ; 0.762,0.889 0.762,-0.889
  silkscreen extent -2.8,-1.2 2.8,1.2
"SMD TACTILE SWITCH" [mm]
  oct 1.8x1.1 smd: 1(0,0) 1(6.2,0) 2(0,-3.7) 2(6.2,-3.7)
  Mechanical 1 keep-out lines w0.1: 7.62,-4.953 7.62,1.27 -1.651,1.27 -1.651,-4.953 7.62,-4.953
  silkscreen extent 1.27,-3.18 5.08,-0.64
"TO-263 D2PACK" [mm]
  rect 2.3x1.19 smd: 1(0,2.413) 2(0,0) 3(0,-2.413)
  rect 7.696x6.502 smd: 2(10.338,0)
  silkscreen extent -1.5,-5.1 14.5,5.1
TQFP144_N [mm] "Thin QFP, 144-Leads, Body 20x20mm, Pitch 0.5mm, IPC Medium Density"
  oval 1.8x0.3 smd: 1(-10.55,8.75) 2(-10.55,8.25) 3(-10.55,7.75) 4(-10.55,7.25) 5(-10.55,6.75) 6(-10.55,6.25) 7(-10.55,5.75) 8(-10.55,5.25) 9(-10.55,4.75) 10(-10.55,4.25) 11(-10.55,3.75) 12(-10.55,3.25) 13(-10.55,2.75) 14(-10.55,2.25) 15(-10.55,1.75) 16(-10.55,1.25) 17(-10.55,0.75) 18(-10.55,0.25) 19(-10.55,-0.25) 20(-10.55,-0.75) 21(-10.55,-1.25) 22(-10.55,-1.75) 23(-10.55,-2.25) 24(-10.55,-2.75) 25(-10.55,-3.25) 26(-10.55,-3.75) 27(-10.55,-4.25) 28(-10.55,-4.75) 29(-10.55,-5.25) 30(-10.55,-5.75) 31(-10.55,-6.25) 32(-10.55,-6.75) 33(-10.55,-7.25) 34(-10.55,-7.75) 35(-10.55,-8.25) 36(-10.55,-8.75) 73(10.55,-8.75) 74(10.55,-8.25) 75(10.55,-7.75) 76(10.55,-7.25) 77(10.55,-6.75) 78(10.55,-6.25) 79(10.55,-5.75) 80(10.55,-5.25) 81(10.55,-4.75) 82(10.55,-4.25) 83(10.55,-3.75) 84(10.55,-3.25) 85(10.55,-2.75) 86(10.55,-2.25) 87(10.55,-1.75) 88(10.55,-1.25) 89(10.55,-0.75) 90(10.55,-0.25) 91(10.55,0.25) 92(10.55,0.75) 93(10.55,1.25) 94(10.55,1.75) 95(10.55,2.25) 96(10.55,2.75) 97(10.55,3.25) 98(10.55,3.75) 99(10.55,4.25) 100(10.55,4.75) 101(10.55,5.25) 102(10.55,5.75) 103(10.55,6.25) 104(10.55,6.75) 105(10.55,7.25) 106(10.55,7.75) 107(10.55,8.25) 108(10.55,8.75)
  oval 0.3x1.8 smd: 37(-8.75,-10.55) 38(-8.25,-10.55) 39(-7.75,-10.55) 40(-7.25,-10.55) 41(-6.75,-10.55) 42(-6.25,-10.55) 43(-5.75,-10.55) 44(-5.25,-10.55) 45(-4.75,-10.55) 46(-4.25,-10.55) 47(-3.75,-10.55) 48(-3.25,-10.55) 49(-2.75,-10.55) 50(-2.25,-10.55) 51(-1.75,-10.55) 52(-1.25,-10.55) 53(-0.75,-10.55) 54(-0.25,-10.55) 55(0.25,-10.55) 56(0.75,-10.55) 57(1.25,-10.55) 58(1.75,-10.55) 59(2.25,-10.55) 60(2.75,-10.55) 61(3.25,-10.55) 62(3.75,-10.55) 63(4.25,-10.55) 64(4.75,-10.55) 65(5.25,-10.55) 66(5.75,-10.55) 67(6.25,-10.55) 68(6.75,-10.55) 69(7.25,-10.55) 70(7.75,-10.55) 71(8.25,-10.55) 72(8.75,-10.55) 109(8.75,10.55) 110(8.25,10.55) 111(7.75,10.55) 112(7.25,10.55) 113(6.75,10.55) 114(6.25,10.55) 115(5.75,10.55) 116(5.25,10.55) 117(4.75,10.55) 118(4.25,10.55) 119(3.75,10.55) 120(3.25,10.55) 121(2.75,10.55) 122(2.25,10.55) 123(1.75,10.55) 124(1.25,10.55) 125(0.75,10.55) 126(0.25,10.55) 127(-0.25,10.55) 128(-0.75,10.55) 129(-1.25,10.55) 130(-1.75,10.55) 131(-2.25,10.55) 132(-2.75,10.55) 133(-3.25,10.55) 134(-3.75,10.55) 135(-4.25,10.55) 136(-4.75,10.55) 137(-5.25,10.55) 138(-5.75,10.55) 139(-6.25,10.55) 140(-6.75,10.55) 141(-7.25,10.55) 142(-7.75,10.55) 143(-8.25,10.55) 144(-8.75,10.55)
  silkscreen extent -10.67,-9.25 9.25,9.57, body extent -10,-10 10,10, height 1.6
TQFP-PF100_L [mm] "Thin QFP, 100-Leads, Body 14x14mm, Pitch 0.5mm, IPC High Density"
  oval 1.55x0.25 smd: 1(-7.525,6) 2(-7.525,5.5) 3(-7.525,5) 4(-7.525,4.5) 5(-7.525,4) 6(-7.525,3.5) 7(-7.525,3) 8(-7.525,2.5) 9(-7.525,2) 10(-7.525,1.5) 11(-7.525,1) 12(-7.525,0.5) 13(-7.525,0) 14(-7.525,-0.5) 15(-7.525,-1) 16(-7.525,-1.5) 17(-7.525,-2) 18(-7.525,-2.5) 19(-7.525,-3) 20(-7.525,-3.5) 21(-7.525,-4) 22(-7.525,-4.5) 23(-7.525,-5) 24(-7.525,-5.5) 25(-7.525,-6) 51(7.525,-6) 52(7.525,-5.5) 53(7.525,-5) 54(7.525,-4.5) 55(7.525,-4) 56(7.525,-3.5) 57(7.525,-3) 58(7.525,-2.5) 59(7.525,-2) 60(7.525,-1.5) 61(7.525,-1) 62(7.525,-0.5) 63(7.525,0) 64(7.525,0.5) 65(7.525,1) 66(7.525,1.5) 67(7.525,2) 68(7.525,2.5) 69(7.525,3) 70(7.525,3.5) 71(7.525,4) 72(7.525,4.5) 73(7.525,5) 74(7.525,5.5) 75(7.525,6)
  oval 0.25x1.55 smd: 26(-6,-7.525) 27(-5.5,-7.525) 28(-5,-7.525) 29(-4.5,-7.525) 30(-4,-7.525) 31(-3.5,-7.525) 32(-3,-7.525) 33(-2.5,-7.525) 34(-2,-7.525) 35(-1.5,-7.525) 36(-1,-7.525) 37(-0.5,-7.525) 38(0,-7.525) 39(0.5,-7.525) 40(1,-7.525) 41(1.5,-7.525) 42(2,-7.525) 43(2.5,-7.525) 44(3,-7.525) 45(3.5,-7.525) 46(4,-7.525) 47(4.5,-7.525) 48(5,-7.525) 49(5.5,-7.525) 50(6,-7.525) 76(6,7.525) 77(5.5,7.525) 78(5,7.525) 79(4.5,7.525) 80(4,7.525) 81(3.5,7.525) 82(3,7.525) 83(2.5,7.525) 84(2,7.525) 85(1.5,7.525) 86(1,7.525) 87(0.5,7.525) 88(0,7.525) 89(-0.5,7.525) 90(-1,7.525) 91(-1.5,7.525) 92(-2,7.525) 93(-2.5,7.525) 94(-3,7.525) 95(-3.5,7.525) 96(-4,7.525) 97(-4.5,7.525) 98(-5,7.525) 99(-5.5,7.525) 100(-6,7.525)
  silkscreen extent -7.65,-6.35 6.35,6.8, body extent -7,-7 7,7, height 1.2
"XBEE PRO S1 WIRELESS MODULE" [mm]
  rect 1.2x1.2 hole 0.6: 1(-11,9)
  round 1.2 hole 0.6: 2(-11,7) 3(-11,5) 4(-11,3) 5(-11,1) 6(-11,-1) 7(-11,-3) 8(-11,-5) 9(-11,-7) 10(-11,-9) 11(11,-9) 12(11,-7) 13(11,-5) 14(11,-3) 15(11,-1) 16(11,1) 17(11,3) 18(11,5) 19(11,7) 20(11,9)
  Top Layer lines w0.1: 12.065,9.906 11.938,10.033 ; -9.906,9.779 -10.033,9.906
  Top Layer keep-out lines w0.1: 12.065,9.906 12.065,-9.906 9.906,-9.906 9.906,10.033 11.938,10.033 ; -9.906,9.779 -9.906,-10.033 -11.938,-10.033 -11.938,9.906 -10.033,9.906
  silkscreen extent -12.19,-16 12.19,17
"XT9M20ANA8M - 8MHZ CAPACITOR" [mm]
  rect 6x2 smd: 1(-4.5,0) 2(4.5,0)
  silkscreen extent -5.7,-2.35 5.7,2.35

## Part data
BB JEPC: "Header, 5-Pin, Dual row"
C1 C3 C11 C14 C16 C18 C20 C30 C39 C41 C42 C44 C45 C46 C47 C48 C69 C73 C77: library part SMD_Cap_Tantalum, "Tantalum Capacitor - Case A"
C2 C4 C5 C6 C7 C8 C9 C12 C13 C15 C17 C19 C21 C22 C23 C24 C25 C26 C27 C28 C29 C31 C32 C33 C34 C35 C38 C40 C43 C49 C56 C57 C58 C59 C60 C61 C62 C63 C64 C65 C66 C67 C68 C70 C71 C72 C74 C75 C76 C78 C79: library part Cap, "Capacitor"
C10 C36 C37: library part "Cap Pol1", "Polarized Capacitor (Radial)"
D1 D3: "40V 5A Scottky Diode"
D2: "3.3V 1.5W Zener Diode"
Debug1 Debug4: library part "Header 4", "Header, 4-Pin"
Debug2 Debug3 Debug5 Debug6: library part "Header 3", "Header, 3-Pin"
FPGA1: "Cyclone II Family, 1.2V FPGA, 85 I/O Pins, 2 PLLs, 144-Pin TQFP, Speed Grade 8, Commercial Grade, Pb-Free"
H1: "DC Power Jack"
Header2: "Header, 6-Pin"
Header3 Header4 Header5 Header6: library part "Header 3H", "Header, 3-Pin, Right Angle"
Header7: "Header, 20-Pin, Dual row, Right Angle"
Header9: library part "PC Wire Connector"
"Header 8": library part "Header 6", "Header, 6-Pin"
IC1: "Three-Axis Digital Output MEMS Gyroscope"
IC2: "3-Axis, 12-bit/8-bit Digital Accelerometer"
IC3 IC4: "128MB 104-MHz SPI Flash Memory"
IC5: "Miniature SPI Digital Barometer"
IC6: "3-Axis Digital Compass IC"
IC7: "High Performance 80 MHz MIPS-Based 32-Bit Flash Microcontroller with USB, CAN and Ethernet, 512KB Program Memory, 100-pin TQFP, Industrial Temperature"
IC8: "16MB FPGA CONFIGURATION DEVICE"
IC9: "EconOscillator Frequency Synthesizer"
J1 J2 J3 J4 J5 J6: "Jumper Wire"
LED1 LED2: library part HSMF-C157, "Surface Mount Chip LED"
LED3: library part "SMD LED", "Surface Mount Chip LED"
Module3: "MicroSD SPI Interface"
Module4: "XBee Pro S1 60mW Wireless Module"
Module5: "Digital Humidity & Temp Sensor"
Module6: library part "Mini USB Connector"
R1 R2 R3 R6 R7 R8 R9 R10 R11 R12 R14 R15 R16 R17 R18 R19 R20 R21 R28: library part Res2, "Resistor"
R4 R5 R13 R27 R29 R30: library part "SMD Resistor Array", "4-Count Resistor Array"
REG1: "Dual 300mA LDO (Lead Free Compliant)"
REG2 REG4: "3.0A LDO Fixed Volt.(ROHS Compliant)"
REG3: "Dual Supply, LV 3.0A LDO(ROHS Compliant)"
S1: "DIP Switch"
S2 S3 S4: library part SW-SPST, "Single-Pole, Single-Throw Switch"
X1: "8MHz SMD Crystal"
X2: "32.768KHz 7pF SMD Crystal"
X3: "OSCILLATOR 25.1750MHZ SMD"

## Free pads (board coordinates)
  round 5 hole 3: MOUNT(41,41) MOUNT(41,86) MOUNT(86,41) MOUNT(86,86)

## Via types
v1: diameter 0.686, hole 0.381, Top Layer to Bottom Layer, 483 vias

## Nets (pads, with @x,y where several pads share a name; then routed paths per layer and width w, separated by ;. In a path a pad name is that pad's centre, name@x,y a point inside that pad or via, vN(x,y) a via of type N, cw(c..) or ccw(c..) an arc to the next point about the centre after c; other vN are vias at no path point)
25MHZ_CLOCK: FPGA1.17 X3.3 | length 8.7
  Top Layer w0.189: v1(70.901,56.261) 71.548,55.614 FPGA1.17@71.548,54.601
  Bottom Layer w0.254: X3.3@69.998,62.611 69.998,59.958 70.901,59.055 v1(70.901,56.261)
+1.2V: C46.1 C56.1 C60.1 C65.1 C70.1 C74.1 C76.1 C77.1 FPGA1.26 FPGA1.35 FPGA1.37 FPGA1.50 FPGA1.62 FPGA1.81 FPGA1.107 FPGA1.109 FPGA1.124 FPGA1.131 Header7.2 REG3.5 | length 409.7
  Top Layer w0.189: v1(60.295,65.959) 60.737,66.401 FPGA1.124@61.748,66.401 ; v1(60.32,62.937) 60.32,62.926 60.346,62.901 FPGA1.131@61.748,62.901 ; FPGA1.109@61.748,73.901 61.748,74.78 62.683,75.714 ; FPGA1.107@64.048,75.701 v1(64.048,77.407) 64.048,109.26 ; v1(76.048,52.896) FPGA1.26@76.048,54.601 ; FPGA1.81@77.048,75.701 v1@77.048,77.669 ; v1(80.548,52.938) FPGA1.35@80.548,54.601 ; v1(81.786,54.803) FPGA1.37@82.848,56.401 83.732,56.401 v1(83.732,55.766) ; FPGA1.50@82.848,62.901 85.004,62.901
  Top Layer w0.254: 62.683,75.714 v1(62.683,76.257) ; 64.048,109.26 67.802,113.014 ; v1(67.802,89.059) 67.802,113.014 ; v1(72.36,118.294) 67.802,113.736 67.802,113.014 ; v1(73.082,118.294) 67.802,113.014 ; v1(77.018,77.407) 77.018,77.664 77.034,77.68 77.036,77.68 v1@77.048,77.669 ; 85.004,62.901 85.746,63.642 v1(85.746,64.156) ; v1(96.65,66.213) 96.947,66.511 v1(96.947,84.552) ; v1(103.856,35.987) 103.856,66.289 102.565,67.58 102.565,82.037 102.591,82.063 103.272,82.063 v1(108.479,87.27)
  Bottom Layer w0.2: C77.1@64.043,76.257 64.048,76.257 v1(64.048,77.407)
  Bottom Layer w0.254: v1(60.295,65.959) 62.708,65.959 63.038,65.629 63.038,63.14 ; v1(60.32,62.937) 60.905,62.352 C65.1@61.633,62.352 ; v1(62.683,76.257) C77.1@64.043,76.257 ; C77.1@64.048,76.257 64.983,76.257 65.934,75.306 67.915,75.306 68.347,75.738 68.347,76.761 69.735,78.15 71.08,78.15 72.45,76.78 76.424,76.754 76.424,75.816 C76.1@76.616,75.816 76.616,77.005 v1(77.018,77.407) ; v1(67.802,89.059) 70.455,86.406 82.919,86.406 83.173,86.152 83.173,84.829 84.836,83.166 116.059,83.166 117.445,84.552 ; v1(72.36,118.294) v1(73.082,118.294) C46.1@78.486,118.294 80.463,118.294 80.549,118.208 REG3.5@82.55,118.208 ; v1(76.048,52.896) 76.048,53.403 C70.1@74.973,54.478 ; v1(80.548,52.938) 80.548,53.766 81.327,54.545 ; v1(81.786,54.803) 81.786,54.571 81.327,54.545 ; v1(83.732,55.766) 82.548,55.766 81.327,54.545 ; v1(85.746,64.156) 85.746,64.566 85.296,65.016 ; C56.1@88.519,23.365 90.396,23.365 90.75,23.719 90.75,28.52 91.093,28.863 96.731,28.863 v1(103.856,35.987) ; v1(96.65,66.213) 96.102,66.761 94.89,66.761 94.884,66.755 87.645,66.755 85.906,65.016 85.296,65.016 ; v1(96.947,84.552) 117.445,84.552 ; v1(108.479,87.27) 116.835,87.27 118.08,86.025 118.08,85.327 118.398,85.009 ; Header7.2@121.851,86.106 120.754,85.009 118.398,85.009 ; C65.1@61.633,62.352 C65.1@61.633,61.849 61.633,60.549 62.014,60.168 63.06,60.168 63.085,60.143 63.085,57.218 62.872,57.005 62.872,53.361 62.44,52.929 62.44,52.325 64.798,49.967 67.194,49.967 69.465,52.237 74.601,52.237 75.105,52.742 75.105,53.678 74.965,53.818 C70.1@74.965,54.478 ; C65.1@61.633,62.352 61.633,62.772 62.001,63.14 63.038,63.14 ; 63.038,63.14 66.137,63.14 67.585,64.588 76.119,64.588 78.456,62.251 80.615,62.251 80.971,62.606 80.971,67.217 81.441,67.686 82.52,67.686 82.963,67.243 C60.1@82.963,66.294 82.963,65.526 84.511,65.526 ; C70.1@74.965,54.478 C70.1@74.973,54.478 ; C70.1@74.965,54.478 C70.1@74.965,54.486 C70.1@74.973,54.478 ; C70.1@74.973,54.478 79.642,54.478 79.65,54.486 C74.1@80.299,54.486 81.327,54.545 ; 84.511,65.526 85.296,65.016 ; 84.511,65.526 85.02,65.016 85.296,65.016 ; 117.445,84.552 117.902,85.009 118.398,85.009
+1.5V: C44.1 Header7.4 REG1.7 | length 29.9
  Top Layer w0.158: REG1.7@118.622,97.472 118.622,97.857
  Top Layer w0.254: 118.622,97.857 119.033,98.268 119.668,98.268 120.036,98.636 v1(120.036,98.7)
  Bottom Layer w0.254: v1(120.036,98.7) 119.93,98.806 C44.1@118.815,98.806 118.815,99.689 119.35,100.224 123.795,100.224 125.878,98.141 125.878,85.632 123.812,83.566 Header7.4@121.851,83.566
+2.8V: C42.1 C57.1 C61.1 C66.1 C69.1 FPGA1.77 FPGA1.95 FPGA1.102 Header7.6 REG1.8 | length 119.2
  Top Layer w0.158: 115.921,97.43 118.122,97.43 REG1.8@118.122,97.472 118.122,98.649
  Top Layer w0.189: FPGA1.102@66.548,75.701 v1(66.548,77.407) ; FPGA1.95@70.048,75.701 v1@70.048,77.284 ; v1@70.048,80.537 v1@70.048,77.284 ; v1(70.185,77.421) v1@70.048,77.284 ; FPGA1.77@79.048,75.701 79.048,77.089 v1(79.365,77.407)
  Top Layer w0.254: v1(66.543,77.415) 65.983,77.975 65.983,80.234 66.324,80.575 v1(66.924,80.575) ; v1(70.049,77.516) v1@70.049,80.537 ; v1(70.049,80.894) v1@70.049,80.537 ; v1(70.087,80.575) v1@70.049,80.537 ; v1(77.821,81.098) v1(79.32,79.599) ; v1(114.88,80.767) 114.88,88.718 115.388,89.226 115.388,93.495 115.962,94.07 119.787,94.07 120.665,94.947 120.665,98.967 120.304,99.328 118.801,99.328 118.122,98.649 ; v1(115.591,97.1) 115.921,97.43
  Bottom Layer w0.2: C69.1@66.548,76.292 v1(66.548,77.407)
  Bottom Layer w0.254: v1(66.543,77.415) 66.543,76.257 C69.1@66.583,76.257 C69.1@66.548,76.292 ; v1(66.924,80.575) v1(70.087,80.575) ; v1(70.049,77.516) 70.176,77.516 70.201,77.491 v1@70.201,77.405 ; v1(70.049,80.894) 70.252,81.098 v1(77.821,81.098) ; v1(70.185,77.421) v1@70.201,77.405 ; C57.1@72.679,75.816 71.79,75.816 ; v1(79.32,79.599) v1@79.421,79.497 ; v1(79.365,77.407) v1@79.421,77.407 ; C61.1@79.41,75.816 79.421,75.816 v1@79.421,77.407 ; v1(114.88,80.767) 116.15,79.751 ; v1(115.591,97.1) 116.77,97.1 C42.1@116.77,97.409 ; Header7.6@121.851,81.026 120.576,79.751 116.15,79.751 ; C66.1@70.201,75.801 v1@70.201,77.405 ; C66.1@70.201,75.801 70.201,75.799 C66.1@70.012,75.799 C66.1@70.201,75.801 ; C66.1@70.201,75.801 71.336,75.816 71.79,75.816 ; v1@70.201,77.405 71.79,75.816 ; v1@79.421,77.407 v1@79.421,79.497 ; v1@79.421,79.497 79.98,79.904 86.736,79.904 87.397,79.243 91.156,79.243 91.512,78.888 115.286,78.888 116.15,79.751
+3.3V: "Header 8.2" BB.4 C1.1 C2.2 C3.1 C4.1 C8.1 C12.1 C13.1 C14.1 C15.2 C17.1 C18.1 C19.2 C21.1 C23.2 C24.1 C25.1 C26.1 C27.1 C28.1 C29.1 C47.1 C58.1 C59.1 C62.1 C63.1 C64.1 C67.1 C68.1 C71.1 C72.1 C73.1 C75.1 FPGA1.5 FPGA1.23 FPGA1.29 FPGA1.46 FPGA1.54 FPGA1.66 FPGA1.116 FPGA1.127 FPGA1.138 Header1.1 Header1.2 Header2.1 Header7.8 IC1.1 IC1.15 IC1.16 IC2.1 IC2.14 IC3.7 IC3.8 IC4.7 IC4.8 IC5.1 IC6.2 IC6.4 IC6.13 IC7.2 IC7.16 IC7.37 IC7.46 IC7.55 IC7.62 IC7.86 IC8.3 IC8.7 IC8.8 J1.1 J2.1 J3.1 J4.1 JEPC.4 Module2.4 Module2.5 Module2.6 Module2.8 Module3.4 Module4.1 Module5.1 R1.2 R2.1 R8.1 R9.1 R10.2 R11.2 R12.2 R16.2 R17.2 R21.2 R27.5 R27.6 R27.7 R27.8 R28.1 REG4.3 S1.1 S1.2 S1.3 S1.4 S2.1 S3.1 S4.1 X3.1 X3.4 | length 1118.3
  Top Layer w0.154: v1(30.349,72.136) 31.715,72.136 IC7.37@31.778,72.128
  Top Layer w0.158: v1(29.714,67.628) IC7.46@31.778,67.628 ; IC7.55@35.303,64.103 35.303,62.68 v1(35.378,62.605) ; IC7.16@37.803,79.153 37.803,80.615 37.841,80.653 v1(37.841,80.958) ; v1(44.801,80.564) 44.803,80.562 IC7.2@44.803,79.153 ; IC7.86@46.828,70.628 v1(49.209,70.628)
  Top Layer w0.189: 49.819,39.759 50.186,39.759 51.151,39.759 IC6.2@51.689,39.759 53.094,39.759 53.714,40.379 IC6.13@53.714,40.784 54.816,40.784 ; 51.151,38.759 IC6.4@51.689,38.759 ; v1@59.211,64.901 FPGA1.127@61.748,64.901 ; 59.681,59.406 v1(60.27,59.406) ; v1(60.295,70.811) 60.705,70.401 FPGA1.116@61.748,70.401 ; 65.198,52.554 65.545,52.901 65.545,53.772 65.548,53.775 FPGA1.5@65.548,54.601 ; 66.668,25.9 IC2.14@67.741,25.9 ; 66.897,24.176 IC2.1@67.875,24.176 ; v1(67.509,23.592) 67.875,23.959 IC2.1@67.875,24.176 ; IC2.1@67.875,24.184 IC2.1@67.875,24.176 ; v1(74.481,53.158) 74.548,53.225 FPGA1.23@74.548,54.601 74.548,55.774 74.573,55.799 77.523,55.799 77.548,55.774 FPGA1.29@77.548,54.601 ; FPGA1.46@82.848,60.901 83.942,60.901 83.984,60.943 v1(86.609,60.943) ; FPGA1.54@82.848,64.901 84.239,64.901 v1(84.247,64.892) ; FPGA1.66@82.848,70.901 v1(84.45,70.901) ; v1@118.618,9.728 118.618,10.688 ; IC1.1@118.618,11.049 118.618,10.688 ; IC1.16@119.393,10.274 119.033,10.274 118.618,10.688 ; v1(60.27,59.406) FPGA1.138@61.748,59.401 60.275,59.401 v1(60.27,59.406)
  Top Layer w0.252: 15.739,55.926 16.037,55.629 20.006,55.629 20.32,55.315 IC4.8@20.32,52.04 ; 17.191,52.04 IC4.8@20.32,52.04 ; IC4.8@20.32,52.037 IC4.8@20.32,52.04 ; v1@21.001,52.091 21.59,52.091 IC4.7@21.59,52.037 ; v1(104.999,15.058) 104.999,15.235 105.177,15.235 105.664,15.235 IC3.8@105.664,15.273
  Top Layer w0.254: Module3.4@10.239,86.569 v1(12.329,86.569) ; v1(12.924,55.926) 13.222,55.629 16.037,55.629 ; C15.2@14.351,62.868 15.032,62.868 15.032,56.633 15.739,55.926 ; v1(16.277,26.437) 16.277,51.126 17.191,52.04 ; IC4.8@20.32,52.037 20.95,52.037 IC4.7@21.59,52.037 ; v1(20.976,52.269) 20.976,52.116 v1@21.001,52.091 ; Module2.4@26.005,14.575 Module2.5@26.005,17.115 Module2.6@26.005,19.655 ; R16.2@26.063,75.692 26.538,75.692 26.538,73.554 26.869,73.224 ; 26.742,72.589 26.869,72.716 26.869,73.224 ; v1(27.377,72.716) 26.869,73.224 ; v1(30.552,45.881) 31.399,46.359 IC5.1@31.399,46.804 ; v1(40.254,90.28) v1(40.254,95.169) v1(40.254,109.165) 56.739,125.649 78.171,125.649 78.501,125.319 S4.1@78.501,123.614 ; C21.1@47.879,39.875 49.703,39.875 49.819,39.759 ; 50.186,39.759 48.927,41.018 48.927,44.671 49.5,45.244 R11.2@50.8,45.244 ; 51.151,38.759 51.126,38.784 51.126,39.734 51.151,39.759 ; 54.816,40.784 56.166,42.134 R12.2@56.166,43.053 56.771,43.053 57.158,43.441 v1(57.158,57.298) ; v1(59.076,64.765) v1@59.211,64.901 ; 65.198,52.554 65.198,51.336 66.162,50.371 66.162,41.372 66.264,41.27 ; v1(66.48,50.999) 66.264,50.783 66.264,41.27 ; 66.668,25.9 66.402,25.634 66.402,24.672 66.897,24.176 ; v1(69.511,36.203) R27.7@69.511,40.123 ; R27.8@70.386,40.123 R27.7@69.511,40.123 ; S4.1@78.501,117.414 S4.1@78.501,123.614 ; S3.1@85.175,117.403 S3.1@85.175,123.603 ; S2.1@91.819,117.403 91.819,119.944 ; v1(92.375,119.388) 91.819,119.944 ; IC3.7@104.394,15.273 105.008,15.244 v1@105.177,15.235 ; v1(108.911,109.927) 109.171,109.927 109.647,110.403 C64.1@110.193,110.403 110.409,110.403 110.409,111.057 110.778,111.425 112.365,111.425 112.873,110.917 112.873,103.983 v1(112.822,103.932) ; v1(118.588,9.698) v1@118.618,9.728 ; IC1.15@119.393,9.624 IC1.16@119.393,10.274 ; v1(121.19,111.995) 123.713,114.518 ; v1(123.713,80.349) 123.713,114.518 ; R21.2@123.713,116.978 123.713,114.518 ; Header1.1@125.095,2.159 Header1.2@125.095,4.699 ; 66.264,41.27 67.432,40.102 67.836,40.102 R27.5@67.836,40.123 R27.6@68.711,40.123 R27.7@69.511,40.123 ; S4.1@78.501,123.614 79.724,124.836 83.941,124.836 S3.1@85.175,123.603 ; S3.1@85.175,123.603 86.409,124.836 90.585,124.836 S2.1@91.819,123.603 91.819,120.493 91.819,119.944
  Bottom Layer w0.154: v1(30.349,72.136) C24.1@31.94,72.136
  Bottom Layer w0.2: C63.1@61.633,70.164 61.633,68.831 68.982,68.707 X3.4@69.998,67.691 X3.1@74.598,67.691
  Bottom Layer w0.254: v1(12.329,86.569) 12.329,96.404 ; R10.2@12.351,100.584 12.351,99.052 ; v1(12.924,55.926) 11.4,54.402 7.908,54.402 7.588,54.722 R17.2@7.588,55.668 4.911,55.668 3.302,57.277 2.205,58.374 2.205,63.724 ; v1(16.277,26.437) 19.17,26.437 20.669,27.935 ; R9.1@20.669,29.718 20.669,27.935 ; v1(20.976,52.269) 21.992,51.253 C13.1@21.992,50.162 ; C12.1@21.971,15.491 25.089,15.491 Module2.4@26.005,14.575 ; C13.1@21.971,50.162 C13.1@21.992,50.162 ; Module2.5@26.005,17.115 29.485,17.115 29.993,17.623 33.015,17.623 33.236,17.402 C23.2@35.941,17.402 40.94,17.402 41.942,18.404 C19.2@46.99,18.404 48.357,18.404 48.403,18.358 C18.1@49.779,18.358 ; Module2.6@26.005,19.655 27.25,20.9 27.25,23.49 Module2.8@26.005,24.735 25.006,24.735 24.663,25.078 23.925,25.078 23.39,24.543 R8.1@22.225,24.543 22.225,26.335 20.669,27.935 ; 26.742,72.589 20.849,72.589 17.394,69.134 7.615,69.134 ; v1(27.377,72.716) 31.94,72.716 C24.1@31.94,72.136 C25.1@31.94,67.628 ; v1(29.714,67.628) C25.1@31.94,67.628 ; v1(30.552,45.881) v1@30.552,45.817 ; C14.1@31.693,45.212 31.693,45.817 v1@30.552,45.817 ; v1(35.378,62.605) 31.94,66.043 C25.1@31.94,67.564 C25.1@31.94,67.628 ; v1(37.841,80.958) 38.07,80.729 C28.1@38.07,78.991 ; C27.1@38.16,64.265 C27.1@38.172,64.265 ; C28.1@38.287,78.991 C28.1@38.07,78.991 ; C47.1@40.132,115.513 40.132,114.346 40.259,114.219 REG4.3@40.259,113.076 40.259,109.169 v1(40.254,109.165) ; v1(40.254,90.28) 51.405,90.28 52.068,89.616 52.068,81.278 46.666,75.876 ; v1(40.254,95.169) 30.298,95.169 23.262,102.205 7.59,102.205 7.236,101.851 C17.1@7.236,100.838 7.236,99.868 8.657,98.447 8.657,96.427 8.974,96.109 10.882,96.109 ; C26.1@44.256,78.991 44.801,78.991 v1(44.801,80.564) 46.666,78.699 46.666,75.876 ; v1(49.209,70.628) 46.666,70.628 C29.1@46.666,70.739 C29.1@46.666,71.039 ; v1(57.158,57.298) 57.905,58.045 59.343,58.045 59.681,58.384 59.681,59.406 47.063,59.406 46.528,59.941 46.528,63.749 46.99,64.211 46.99,64.756 46.643,65.104 41.626,65.104 40.788,64.265 C27.1@38.172,64.265 ; v1(59.076,64.765) v1@59.213,64.74 ; C4.1@60.074,26.797 60.074,24.98 61.284,23.77 61.284,23.084 ; v1(60.27,59.406) 60.574,59.406 60.803,59.177 61.633,59.177 C71.1@61.633,58.674 ; v1(60.295,70.811) 61.633,70.811 C63.1@61.633,70.231 C63.1@61.633,70.164 ; C75.1@61.633,64.516 61.633,64.74 v1@59.213,64.74 ; v1(66.48,50.999) 66.817,51.336 ; v1(69.511,36.203) 71.76,33.954 72.853,33.954 Header2.1@75.057,31.75 76.105,30.702 R2.1@76.105,25.908 76.105,23.617 75.089,22.601 R1.2@75.089,20.32 ; X3.4@69.998,67.691 60.535,67.691 60.422,67.578 58.39,67.578 ; v1(74.481,53.158) 74.163,53.158 73.274,54.047 70.053,54.047 67.342,51.336 66.817,51.336 ; X3.1@74.598,67.691 77.521,67.691 77.999,68.169 77.999,70.493 78.393,70.887 82.545,70.887 82.545,70.796 C62.1@82.963,70.379 ; C62.1@82.963,69.596 C62.1@82.963,70.379 ; v1(84.247,64.892) 82.988,64.892 82.963,64.867 C59.1@82.963,63.627 82.963,62.454 ; v1(84.45,70.901) 83.928,70.379 C62.1@82.963,70.379 ; v1(86.609,60.943) 83.204,60.943 82.963,61.184 82.963,62.454 ; C72.1@91.948,19.792 91.034,19.792 89.433,21.393 C73.1@85.725,21.393 80.926,21.393 79.853,20.32 R1.2@75.089,20.32 ; v1(92.375,119.388) 92.375,119.071 93.798,117.648 S1.1@95.041,116.726 S1.2@97.581,116.726 S1.3@100.121,116.726 S1.4@102.661,116.726 106.085,120.149 114.603,120.149 ; C8.1@103.759,17.021 C8.1@103.78,17.021 ; v1(104.999,15.058) 104.974,17.021 C8.1@103.78,17.021 ; IC8.7@107.283,109.263 IC8.7@107.421,109.263 ; IC8.8@107.283,110.533 107.421,110.533 IC8.7@107.421,109.263 ; v1(108.911,109.927) 108.247,109.263 ; v1(112.822,103.932) 112.822,104.364 113.889,105.431 117.128,105.431 117.496,105.799 117.496,108.326 ; IC8.3@113.233,107.993 112.902,107.993 112.902,108.541 112.873,108.569 110.315,108.569 109.622,109.263 108.247,109.263 ; BB.4@116.035,121.582 114.603,120.149 ; v1(118.588,9.698) 118.66,9.77 C1.1@118.66,10.536 ; C1.1@118.66,10.724 C1.1@118.66,10.536 ; v1(121.19,111.995) R28.1@121.19,108.839 121.19,107.857 120.872,107.539 118.283,107.539 117.496,108.326 ; Header7.8@121.851,78.486 v1(123.713,80.349) ; Header1.2@125.095,4.699 120.688,4.699 C2.2@118.6,6.787 ; 2.205,63.724 2.205,64.994 10.882,73.671 ; 2.205,63.724 7.615,69.134 ; 7.615,69.134 10.882,72.401 10.882,73.671 ; 10.882,73.671 12.721,75.51 16.836,75.51 16.988,75.357 27.783,75.357 29.764,77.338 30.526,77.338 30.806,77.618 33.877,77.618 35.251,78.991 C28.1@38.07,78.991 ; 10.882,73.671 10.882,96.109 ; 10.882,96.109 Module5.1@12.329,97.536 ; 10.882,96.109 12.034,96.109 12.329,96.404 ; 12.329,96.404 12.351,96.427 12.351,99.052 ; 12.329,96.404 Module5.1@12.329,97.536 ; Module5.1@12.329,97.536 12.329,99.03 12.351,99.052 ; C13.1@21.992,50.162 24.517,50.162 25.268,49.411 ; 25.268,49.411 25.268,50.389 25.66,50.781 26.208,50.781 29.917,54.489 29.917,58.226 31.477,59.787 35.924,59.787 38.172,62.034 C27.1@38.172,64.265 ; 25.268,49.411 25.688,48.992 26.323,48.992 29.498,45.817 v1@30.552,45.817 ; C29.1@46.666,71.039 46.666,75.876 ; C29.1@46.666,71.039 49.602,71.039 50.12,70.521 55.352,70.521 58.295,67.578 58.39,67.578 ; C18.1@49.779,18.358 49.779,15.848 49.763,15.832 49.763,11.975 50.135,11.603 52.993,11.603 53.437,11.159 53.437,9.561 Module4.1@52.499,8.623 54.427,6.695 54.427,3.717 54.833,3.31 C67.1@56.569,3.31 C68.1@60.38,3.31 C68.1@61.032,3.31 ; C18.1@49.779,18.358 C18.1@49.784,18.358 50.899,18.358 51.583,17.674 60.954,17.674 61.284,18.004 C3.1@61.284,21.971 61.284,23.084 ; 58.39,67.578 57.96,66.978 57.96,65.993 v1@59.213,64.74 ; C68.1@61.032,3.31 62.492,3.31 J1.1@68.199,9.017 J2.1@79.375,9.017 J4.1@90.678,9.017 J3.1@101.981,9.017 103.78,10.816 C8.1@103.78,17.021 ; C68.1@61.032,3.31 61.032,2.053 62.124,0.961 117.863,0.961 118.6,1.697 C2.2@118.6,6.787 ; 61.284,23.084 61.792,23.592 v1(67.509,23.592) 67.864,23.236 69.007,23.236 70.43,21.814 70.43,21.357 71.331,20.455 71.331,19.592 71.649,19.274 74.772,19.274 75.089,19.592 R1.2@75.089,20.32 ; 66.817,51.336 67.128,51.646 67.128,54.486 C58.1@67.726,54.486 69.007,54.486 70.158,55.637 72.385,55.637 73.284,56.536 81.898,56.536 82.418,57.057 82.418,58.962 82.101,59.279 79.256,59.279 78.939,59.597 78.939,61.209 79.345,61.616 82.125,61.616 82.963,62.454 ; IC8.7@107.421,109.263 108.247,109.263 ; 114.603,120.149 114.603,117.172 JEPC.4@116.035,115.74 116.035,109.787 117.496,108.326 ; C2.2@118.6,6.787 118.817,7.004 118.817,10.536 C1.1@118.66,10.536